# Altium PCB PCB_Propu.PcbDoc
Units mm, origin at the board's own origin, x right, y up, seen from the top; angles counter-clockwise.
Board outline 76 x 45 mm, 2 copper layers (Top Layer, Bottom Layer); 28 components, 19 nets, 94 pads, 0 vias.
Unrouted connection lines stored in the file: 15.
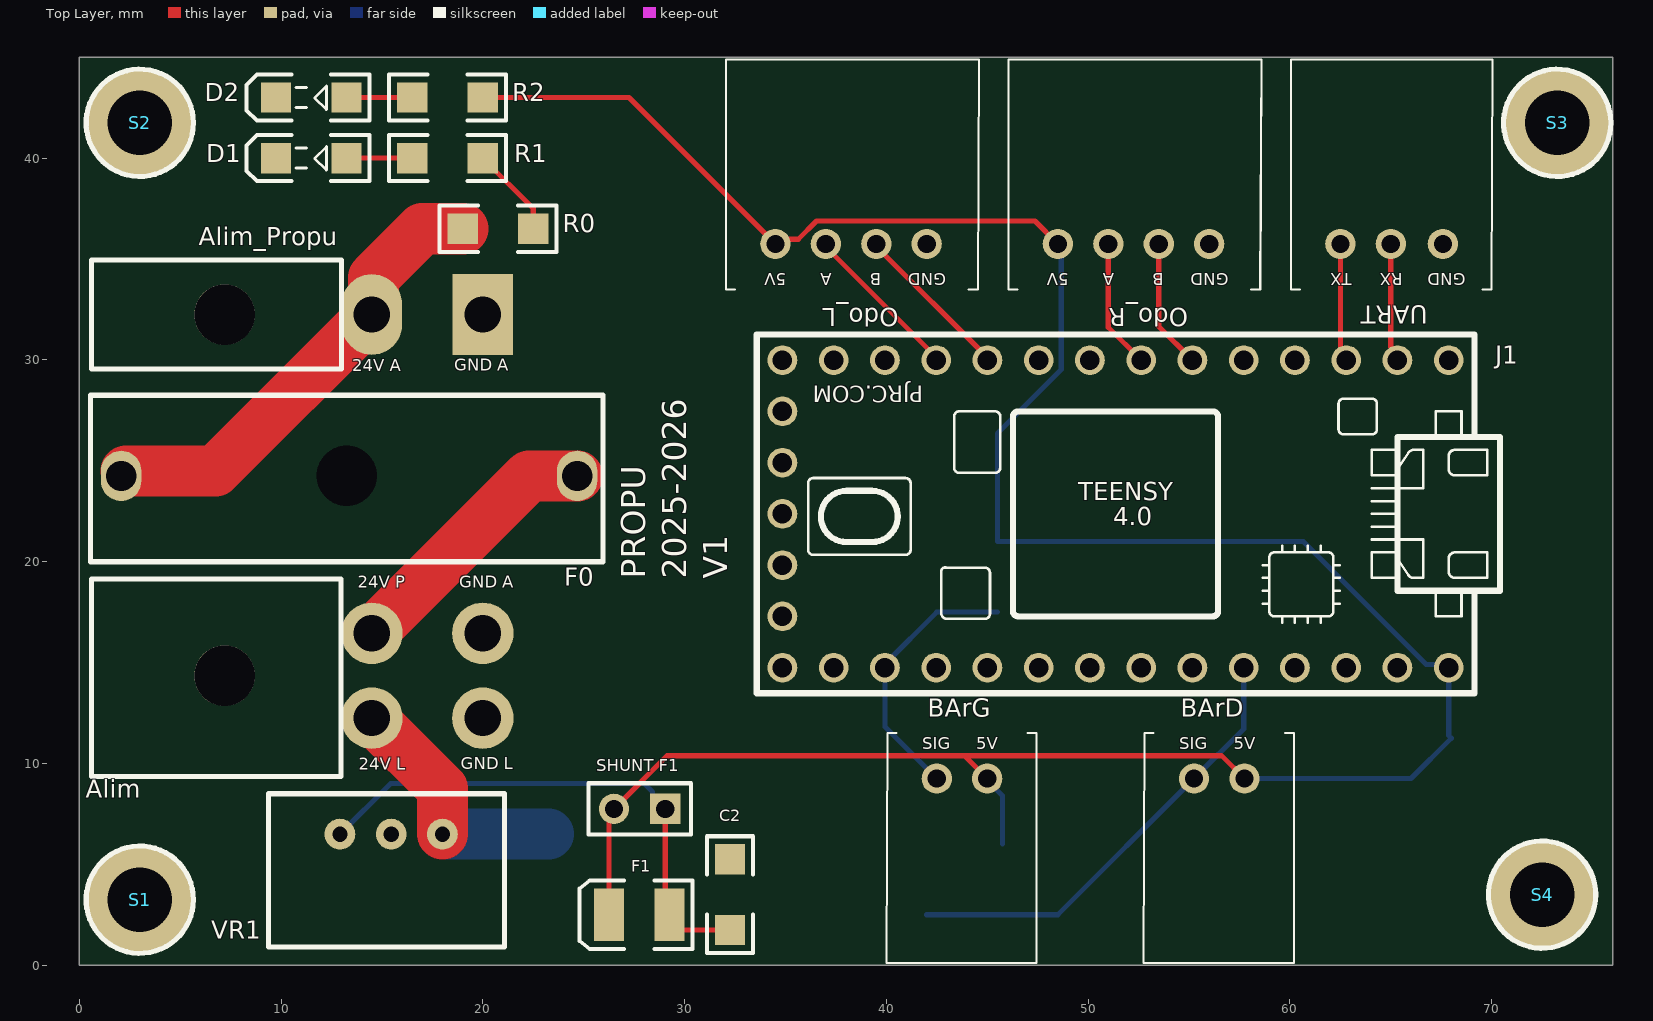
[diagram p0: Top Layer view]
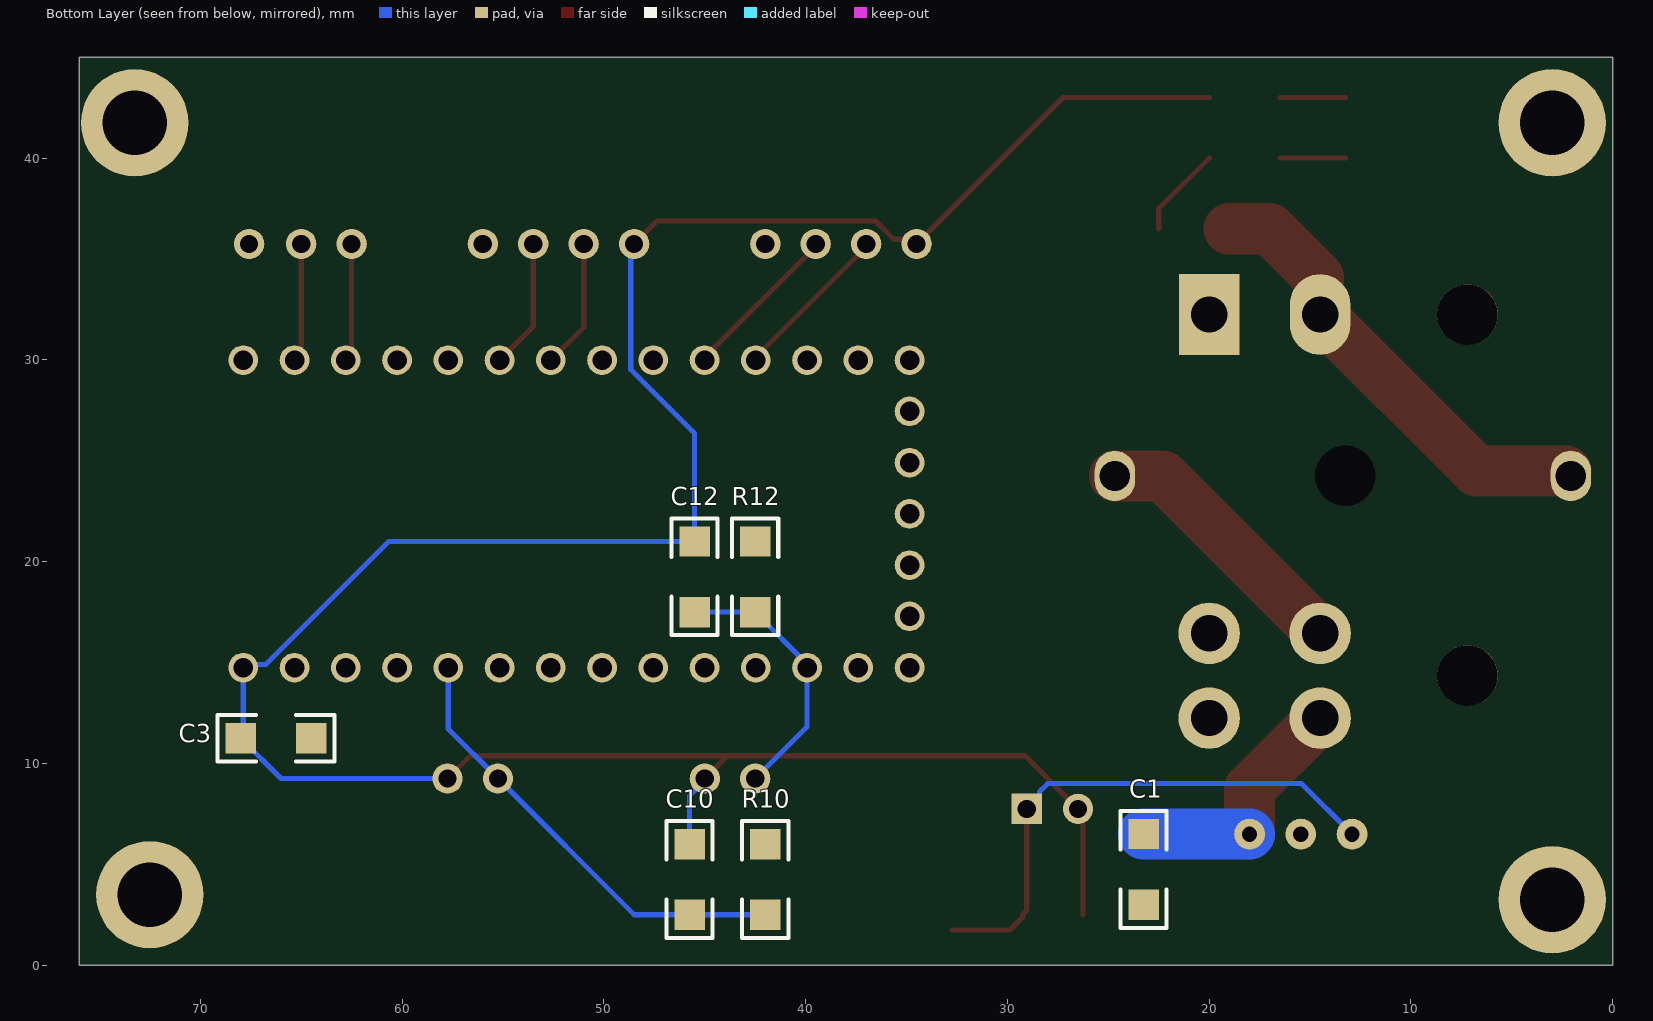
[diagram p1: Bottom Layer view, seen from below]

## Layer stack, top to bottom
Top Solder: solder mask 0.0102, Solder Resist, Dk 3.5
Top Layer: signal copper 0.0356
Dielectric 1: dielectric 0.32, FR-4, Dk 4.8
Bottom Layer: signal copper 0.0356
Bottom Solder: solder mask 0.0102, Solder Resist, Dk 3.5

## Board outline
0,0 0,45 76,45 76,0

## Design rules (kind name [scope] priority, off if disabled: settings)
Clearance [All] p1: gap=0.254 ignorepadtopadclearanceinfootprint=FALSE
PolygonConnect [All] p1: connectstyle=Relief reliefconductorwidth=0.254 reliefentries=4 polygonreliefangle="90 Angle" airgapwidth=0.254
RoutingVias [All] p1: holewidth=0.711 width=1.27 viastyle="Through Hole" minholewidth=0.711 minwidth=1.27 maxholewidth=0.711 maxwidth=1.27
SolderMaskExpansion [All] p1: expansion=0.102 istentingtop=FALSE
SupplyNets "Schematic Supply Nets_6" [InNet('GND_A')] p1: voltage=0.000
SupplyNets "Schematic Supply Nets_5" [InNet('GND_L')] p2: voltage=0.000
SupplyNets "Schematic Supply Nets_4" [InNet('24V_P')] p3: voltage=0.000
SupplyNets "Schematic Supply Nets_3" [InNet('5V_L')] p4: voltage=0.000
SupplyNets "Schematic Supply Nets_2" [InNet('24V_A')] p5: voltage=0.000
SupplyNets "Schematic Supply Nets_1" [InNet('24V_L')] p6: voltage=0.000
SupplyNets "Schematic Supply Nets" [InNet('3V_L')] p7: voltage=0.000
Width [All] p1: maxlimit=2.54 minlimit=0.254 preferedwidth=0.254 minimp=50.000000 maximp=50.000000 favimp=50.000000
30 further rules are at their usual default settings.

## Components (designator, comment, footprint, x,y, rotation, side; value= is the part's Value field where it differs from the comment)
Alim "MinifitJr 2X2H" MOLEX_MINIFITJR_2X2H 14.5,12.25 r270 top
Alim_Propu "MinifitJR 2H" Molex_MiniFitJr_2x1H 14.5,32.25 r180 top
BArD "JST XH 2" S2B-XH-A 57.75,9.25 r180 top
BArG "JST XH 2" S2B-XH-A 45,9.25 r180 top
C1 "" "Capacitor 1206" 23.25,4.75 r90 bottom value=10uF
C2 "(Optinal)" "Capacitor 1206" 32.25,3.5 r270 top value=10uF
C3 "(Optinal)" "Capacitor 1206" 66.25,11.25 r0 bottom value=10uF
C10 "Cap" "Capacitor 1206" 45.75,4.25 r90 bottom value=10nf
C12 "Cap" "Capacitor 1206" 45.5,19.25 r90 bottom value=10nf
D1 "A" KP-3216SEC 11.5,40 r180 top
D2 "L" KP-3216SEC 11.5,43 r180 top
F0 "10A max" Fuse 24.68,24.25 r180 top
F1 "500mA" 3.5X2.8X1.9 27.75,2.5 r180 top
J1 "TEENSY_4.0" TEENSY_4.0 51.36,22.37 r180 top
Odo_L "JST XH 4" S4B-XH-A 34.5,35.75 r0 top
Odo_R "JST XH 4" S4B-XH-A 48.5,35.75 r0 top
R0 "Res2" "Resistor 1206" 20.75,36.5 r0 top value=1K1
R1 "Res2" "Resistor 1206" 18.25,40 r180 top value=1K1
R2 "Res2" "Resistor 1206" 18.25,43 r180 top value=300
R10 "Res2" "Resistor 1206" 42,4.25 r90 bottom value=10K
R12 "Res2" "Resistor 1206" 42.5,19.25 r90 bottom value=10K
S1 "Screw M3" "Screw M3" 3,3.25 r0 top
S2 "Screw M3" "Screw M3" 3,41.75 r0 top
S3 "Screw M3" "Screw M3" 73.25,41.75 r0 top
S4 "Screw M3" "Screw M3" 72.5,3.5 r0 top
"SHUNT F1" "Header 2" HDR1X2 29.04,7.75 r180 top
UART "JST XH 3" S3B-XH-A 62.5,35.75 r0 top
VR1 "TSR 1-2405" TRS 18,6.5 r0 top

## Footprints (in the part's own frame and the unit in brackets; to place one, negate y for a bottom-side part, rotate by r counter-clockwise, add the part's x,y. Pads: shape width x height; smd on the part's side, far side on the other; paste and mask are expansions set on the pad)
3.5X2.8X1.9 [mm] "SM LED; 2 C-Bend Leads; Body 3.5 x 2.8 x 1.9 mm, inc leads (LxWxH typ)"
  rect 1.5x2.6 smd: 1(-1.5,0) 2(1.5,0)
  silkscreen extent -2.65,-1.7 2.95,1.7
"Capacitor 1206" [mm]
  rect 1.5x1.5 smd: 1(-1.75,0) 2(1.75,0)
  silkscreen extent -2.89,-1.14 2.89,1.14, body extent -1.97,-0.99 1.97,0.96, height 1.3
Fuse [mm] "Porte-fusible monté sur circuit 10 (UL) A, 6.3 (VDE) A, fusible Cartouche, 893-0574"
  round 2 hole 3: 0(11.43,0)
  oval 2x2.5 hole 1.5: 1(0,0) 2(22.6,0)
  silkscreen extent -1.27,-4 24.13,4.25, body extent -1.27,-4.29 24.13,4.29, height 11.41
HDR1X2 [mm] "Connector; Header; 2 Position"
  rect 1.5x1.5 hole 0.9: 1(0,0)
  round 1.5 hole 0.9: 2(2.54,0)
  silkscreen extent -1.27,-1.27 3.81,1.27
KP-3216SEC [mm]
  rect 1.5x1.5 smd: 1(-1.75,0) 2(1.75,0)
  silkscreen extent -2.89,-1.14 3.2,1.14, body extent -1.7,-0.79 1.5,0.81, height 1.1
Molex_MiniFitJr_2x1H [mm] "Connecteur Molex 2"
  rect 3x4 hole 1.8: 1(-5.5,0)
  oval 3x4 hole 1.8: 2(0,0)
  round 3 hole 3 unplated: 3(7.3,0)
  silkscreen extent 1.5,-2.7 13.9,2.7, body extent -6.03,-2.7 13.9,3.1, height 11.01
MOLEX_MINIFITJR_2X2H [mm] "MOLEX_MINIFITJR_3X2, 39-30-1060"
  round 3.048 hole 1.8: 1(-4.2,5.5) 2(-4.2,0) 3(0,5.5) 4(0,0)
  round 3 hole 3 unplated: 10(-2.1,-7.3)
  silkscreen extent -6.9,-13.9 2.9,-1.52, body extent -6.88,-13.9 3.12,6.03, height 11.4
"Resistor 1206" [mm]
  rect 1.5x1.5 smd: 1(-1.75,0) 2(1.75,0)
  silkscreen extent -2.89,-1.14 2.89,1.14, body extent -1.98,-0.95 1.98,0.93, height 0.55
S2B-XH-A [mm]
  round 1.5 hole 0.9: 1(0,0) 2(2.5,0)
  silkscreen extent -2.45,-2.26 5,9.14, body extent -2.41,-2.32 4.99,9.18, height 6.15
S3B-XH-A [mm]
  round 1.5 hole 0.9: 1(0,0) 2(2.5,0) 3(5.08,0)
  silkscreen extent -2.45,-2.26 7.54,9.14, body extent -2.44,-2.27 7.46,9.23, height 6.15
S4B-XH-A [mm]
  round 1.5 hole 0.9: 1(0,0) 2(2.5,0) 3(5,0) 4(7.5,0)
  silkscreen extent -2.45,-2.26 10.08,9.14, body extent -2.44,-2.32 9.96,9.18, height 6.15
"Screw M3" [mm] "M3 iso Screw"
  round 5.32 hole 3.2 unplated: 0(0,0)
  silkscreen extent -2.66,-2.66 2.66,2.66
TEENSY_4.0 [mil]
  round 58 hole 38: 0/RX(-550,-300) 1/TX(-450,-300) 2(-350,-300) 3/CANTX(-250,-300) 3V3_LN(650,-100) 3V3_LO(-450,300) 4/CANRX(-150,-300) 5(-50,-300) 6(50,-300) 7(150,-300) 8(250,-300) 9/CS(350,-300) 10/CS(450,-300) 11/MOSI(550,-300) 12/MISO(650,-300) 13/SCK(650,300) 14/A0(550,300) 15/A1(450,300) 16/A2(350,300) 17/A3(250,300) 18/A4/SDA(150,300) 19/A5/SCL(50,300) 20/A6(-50,300) 21/A7(-150,300) 22/A8(-250,300) 23/A9(-350,300) GND(-650,-300) GND2(-550,300) GND3(650,0) ON/OFF(650,200) PROG(650,100) VBAT\(650,-200) VIN(-650,300)
  silkscreen extent -750,-350 700,350, body extent -728,-350 700,350, height 172
TRS [mil]
  round 60 hole 30: 1(0,0) 2(-100,0) 3(-200,0)
  silkscreen extent -340,-220 121,79, body extent -341,-218 120,80, height 398

## Part data
Alim: library part "Header 2X2H", "Header, 2-Pin, Dual row, Right Angle", LatestRevisionDate=17-Jul-2002, LatestRevisionNote="Re-released for DXP Platform.", Publisher="Altium Limited"
Alim_Propu BArD BArG: library part "Header 2", "Header, 2-Pin", LatestRevisionDate=17-Jul-2002, LatestRevisionNote="Re-released for DXP Platform.", Publisher="Altium Limited"
C1 C2 C3: library part Cap, "Capacitor", LatestRevisionDate=17-Jul-2002, LatestRevisionNote="Re-released for DXP Platform.", PackageDescription="Radial Cap, Thru-Hole; 2 Leads; 0.3 in Pin Spacing", PackageReference=RAD-0.3, Published=8-Jun-2000, Publisher="Altium Limited"
C10 C12: "Capacitor", LatestRevisionDate=17-Jul-2002, LatestRevisionNote="Re-released for DXP Platform.", PackageDescription="Radial Cap, Thru-Hole; 2 Leads; 0.3 in Pin Spacing", PackageReference=RAD-0.3, Published=8-Jun-2000, Publisher="Altium Limited"
D1 D2: library part LED2, "Typical RED, GREEN, YELLOW, AMBER GaAs LED", LatestRevisionDate=17-Jul-2002, LatestRevisionNote="Re-released for DXP Platform.", PackageDescription="SM LED; 2 Flat Leads", PackageReference=3.2X1.6X1.1, PackageVersion=Feb-2002, Published=8-Jun-2000, Publisher="Altium Limited"
F0: library part "Fuse 2", "Main Fuse", LatestRevisionDate=17-Jul-2002, LatestRevisionNote="Re-released for DXP Platform.", PackageDescription="Thru-Hole; 2 Leads", PackageReference=PIN-W2/E2.8, Published=8-Jun-2000, Publisher="Altium Limited"
F1: library part "Fuse 2", "Fuse", LatestRevisionDate=17-Jul-2002, LatestRevisionNote="Re-released for DXP Platform.", PackageDescription="Thru-Hole; 2 Leads", PackageReference=PIN-W2/E2.8, Published=8-Jun-2000, Publisher="Altium Limited"
J1: Package=None, Check_prices=https://www.snapeda.com/parts/Teensy%204.0/PJRC/view-part/?ref=eda, MF=PJRC, MP="Teensy 4.0", SnapEDA_Link=https://www.snapeda.com/parts/Teensy%204.0/PJRC/view-part/?ref=snap
Odo_L Odo_R: library part "Header 4H", "Molex SPOX 4x1H", LatestRevisionDate=17-Jul-2002, LatestRevisionNote="Re-released for DXP Platform.", Publisher="Altium Limited"
R0 R1 R2 R10 R12: "Resistor", LatestRevisionDate=17-Jul-2002, LatestRevisionNote="Re-released for DXP Platform.", PackageDescription="Axial Device, Thru-Hole; 2 Leads; 0.4 in Pin Spacing", PackageReference=AXIAL-0.4, Published=8-Jun-2000, Publisher="Altium Limited"
"SHUNT F1": "Header, 2-Pin", LatestRevisionDate=17-Jul-2002, LatestRevisionNote="Re-released for DXP Platform.", Publisher="Altium Limited"
UART: library part "Header 3H", "Header, 3-Pin, Right Angle", LatestRevisionDate=17-Jul-2002, LatestRevisionNote="Re-released for DXP Platform.", Publisher="Altium Limited"
VR1: library part "Volt Reg", "Voltage Regulator", LatestRevisionDate=29-May-2009, LatestRevisionNote="IPC-7351 Footprint Added.", PackageDescription="3-Pin Transistor Outline Package 2.54 mm Pitch, 15.1 mm Lead Span", PackageReference=D2PAK, Published=24-Mar-1999, Publisher="Altium Limited"

## Nets (pads, with @x,y where several pads share a name; then routed paths per layer and width w, separated by ;. In a path a pad name is that pad's centre, name@x,y a point inside that pad or via, vN(x,y) a via of type N, cw(c..) or ccw(c..) an arc to the next point about the centre after c; other vN are vias at no path point)
3V_L: J1.3V3_LO
5V_L: "SHUNT F1.2" BArD.1 BArG.1 C3.2 C10.2 C12.2 F1.2 J1.VIN Odo_L.1 Odo_R.1 R2.1 | length 131.5
  Top Layer w0.254: R2.1 27.25,43 Odo_L.1 34.73,35.98 35.631,35.98 36.532,36.881 47.369,36.881 Odo_R.1 ; F1.2 26.25,7.163 26.5,7.413 26.5,7.75 29.131,10.381 43.869,10.381 ; BArG.1 43.869,10.381 ; BArD.1 56.619,10.381 43.869,10.381
  Bottom Layer w0.254: BArG.1 45,9.151 45.75,8.401 C10.2 ; Odo_R.1 48.668,35.582 48.668,29.527 45.5,26.359 C12.2 60.661,21 66.752,14.908 67.712,14.908 J1.VIN 67.87,11.38 C3.2 66,9.25 BArD.1
24V_A: Alim_Propu.2 F0.2 R0.1 | length 23
  Top Layer w0.254: F0.2 F0.2@2.33,24.5
  Top Layer w2.54: F0.2@2.33,24.5 6.75,24.5 14.588,32.338 14.588,34.088 17,36.5 R0.1
24V_L: Alim.4 C1.2 VR1.1 | length 12.4
  Top Layer w2.54: Alim.4 18,8.75 VR1.1
  Bottom Layer w2.54: VR1.1 C1.2
24V_P: Alim.2 F0.1 | length 13.4
  Top Layer w2.54: Alim.2 22.3,24.25 F0.1
GND_A: Alim.1 Alim_Propu.1 D1.2
GND_L: Alim.3 C1.1 C2.1 C3.1 D2.2 J1.GND J1.GND2 J1.GND3 Odo_L.4 Odo_R.4 R10.2 R12.2 UART.3 VR1.2
NetC2_2: "SHUNT F1.1" C2.2 F1.1 VR1.3 | length 27
  Top Layer w0.254: 29.04,7.75 29.04,2.71 F1.1 29.25,2.373 29.873,1.75 C2.2@32.75,1.75
  Bottom Layer w0.254: VR1.3 15.42,9 28,9 28.417,8.583 28.417,8.373 29.04,7.75
NetD1_1: D1.1 R1.2 | length 3.3
  Top Layer w0.254: D1.1 R1.2
NetD2_1: D2.1 R2.2 | length 3.3
  Top Layer w0.254: D2.1 R2.2
NetR0_2: R0.2 R1.1 | length 4.5
  Top Layer w0.254: R1.1 22.5,37.5 R0.2
T_Bump_ArD: BArD.2 C10.1 J1.22/A8 R10.1 | length 22.6
  Bottom Layer w0.254: R10.1 C10.1 48.5,2.5 BArD.2 57.71,11.71 J1.22/A8
T_Bump_ArG: BArG.2 C12.1 J1.15/A1 R12.1 | length 13.4
  Bottom Layer w0.254: BArG.2@42.485,9.265 BArG.2 39.93,11.82 J1.15/A1 39.93,14.93 R12.1 C12.1
T_Odo_L_A: J1.9/CS Odo_L.2 | length 8
  Top Layer w0.254: Odo_L.2 37,35.605 42.47,30.135 J1.9/CS
T_Odo_L_B: J1.8 Odo_L.3 | length 8
  Top Layer w0.254: Odo_L.3 39.5,35.625 45.01,30.115 J1.8
T_Odo_R_A: J1.5 Odo_R.2 | length 6.4
  Top Layer w0.254: Odo_R.2 51,31.62 J1.5
T_Odo_R_B: J1.4/CANRX Odo_R.3 | length 6.5
  Top Layer w0.254: Odo_R.3 53.5,31.66 J1.4/CANRX
T_RX1: J1.0/RX UART.2 | length 5.6
  Top Layer w0.254: UART.2@65,35.5 65,30.65 65.33,30.32 J1.0/RX
T_TX1: J1.1/TX UART.1 | length 5.6
  Top Layer w0.254: UART.1@62.5,35.5 62.5,30.61 62.79,30.32 J1.1/TX
pads on no net: Alim.10 Alim_Propu.3 F0.0 J1.2 J1.3/CANTX J1.3V3_LN J1.6 J1.7 J1.10/CS J1.11/MOSI J1.12/MISO J1.13/SCK J1.14/A0 J1.16/A2 J1.17/A3 J1.18/A4/SDA J1.19/A5/SCL J1.20/A6 J1.21/A7 J1.23/A9 J1.ON/OFF J1.PROG J1.VBAT\ S1.0 S2.0 S3.0 S4.0

## Silkscreen, mask and mechanical layers (free items; w line width, h text height)
Top Overlay:
  text "5V" at 35.033,34.489 h1.02 r180
  text "A" at 37.304,34.5 h1.02 r180
  text "B" at 39.745,34.5 h1.02 r180
  text "GND" at 42.961,34.489 h1.02 r180
  text "5V" at 49.033,34.489 h1.02 r180
  text "A" at 51.304,34.5 h1.02 r180
  text "B" at 53.745,34.5 h1.02 r180
  text "GND" at 56.961,34.489 h1.02 r180
  text "TX" at 63.066,34.5 h1.02 r180
  text "RX" at 65.592,34.5 h1.02 r180
  text "GND" at 68.711,34.489 h1.02 r180
  text "24V A" at 13.526,29.25 h1.02
  text "GND A" at 18.586,29.261 h1.02
  text "PROPU / 2025-2026 / V1" at 32.5,19.152 h2.03 r90
  text "GND A" at 18.836,18.511 h1.02
  text "24V P" at 13.796,18.5 h1.02
  text "SIG" at 41.767,10.511 h1.02
  text "5V" at 44.467,10.511 h1.02
  text "SIG" at 54.517,10.511 h1.02
  text "5V" at 57.217,10.511 h1.02
  text "GND L" at 18.902,9.511 h1.02
  text "24V L" at 13.842,9.5 h1.02

## Text inside footprints (layer, text, board x,y; h text height)
J1: Top Overlay "TEENSY" at 49.5,22.75 h1.52; Top Overlay "4.0" at 51.25,21.5 h1.52; Top Overlay "PJRC.COM" at 41.835,28.72 h0.81 r180